# Altium PCB PCB1.PcbDoc (part 1 of 2)
Units mm, origin at the board's own origin, x right, y up, seen from the top; angles counter-clockwise.
Board outline 43.94 x 69.98 mm, 2 copper layers (Top Layer, Bottom Layer); 43 components, 85 nets, 278 pads, 109 vias.
Unrouted connection lines stored in the file: 29.
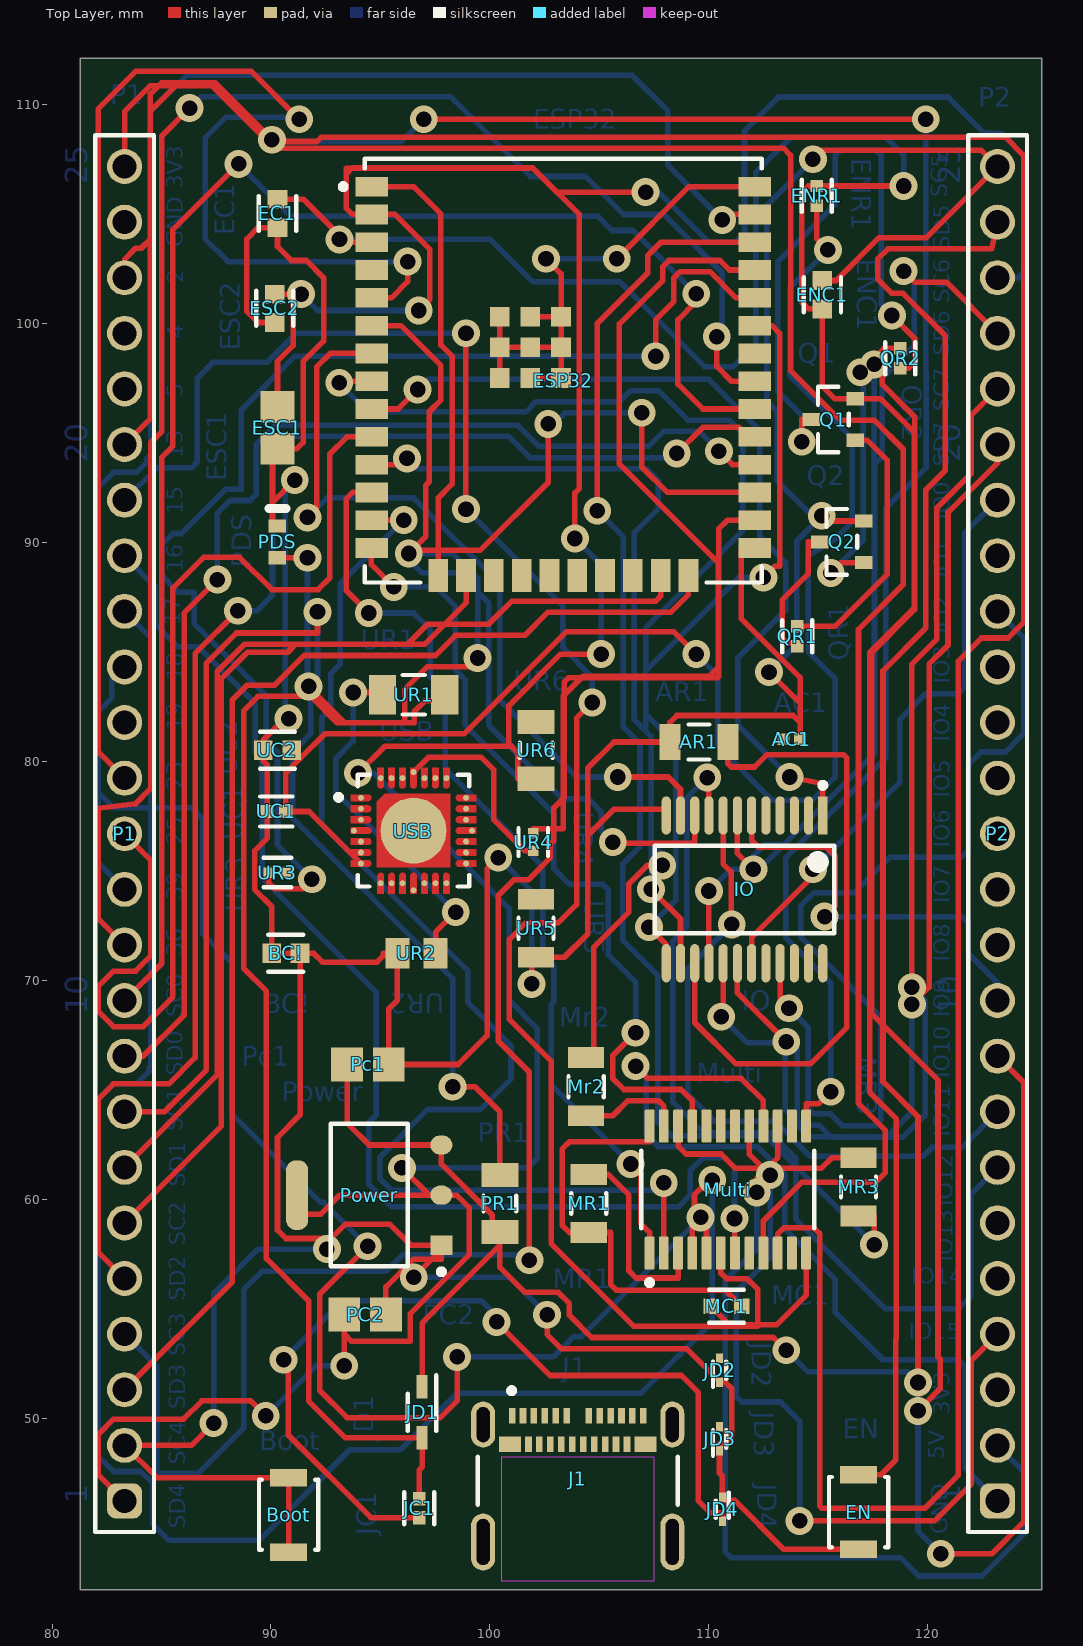
[diagram p0: Top Layer view]
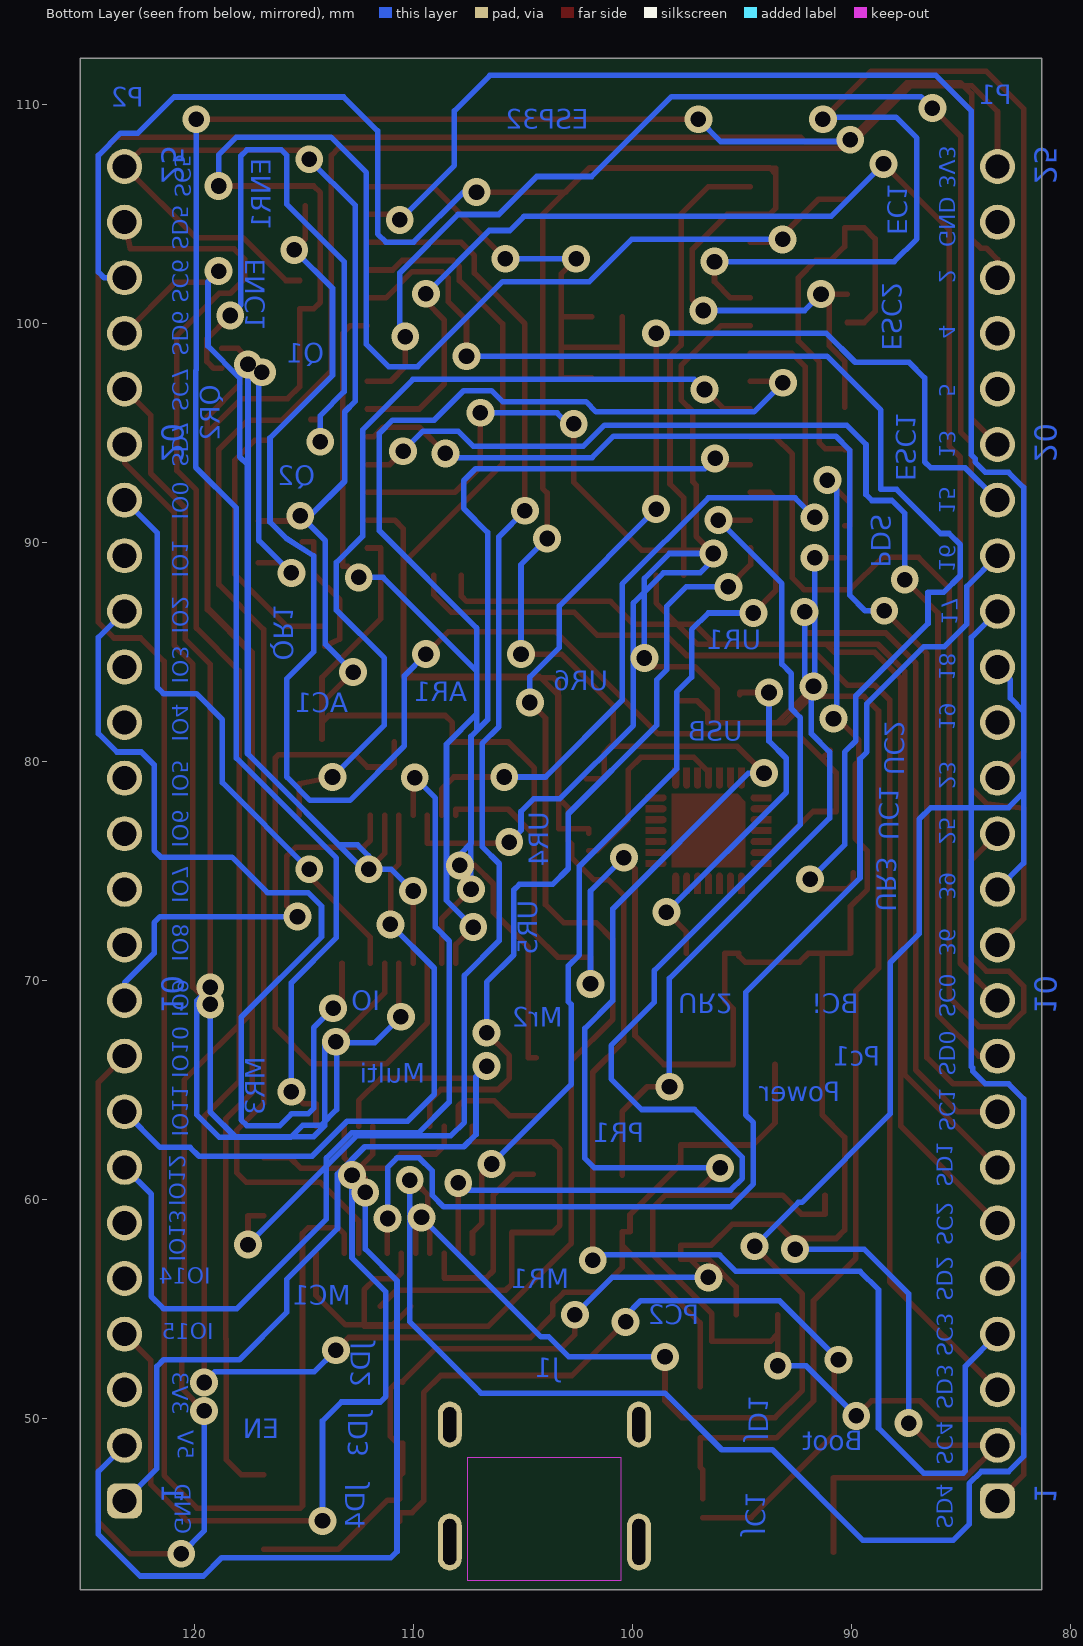
[diagram p1: Bottom Layer view, seen from below]
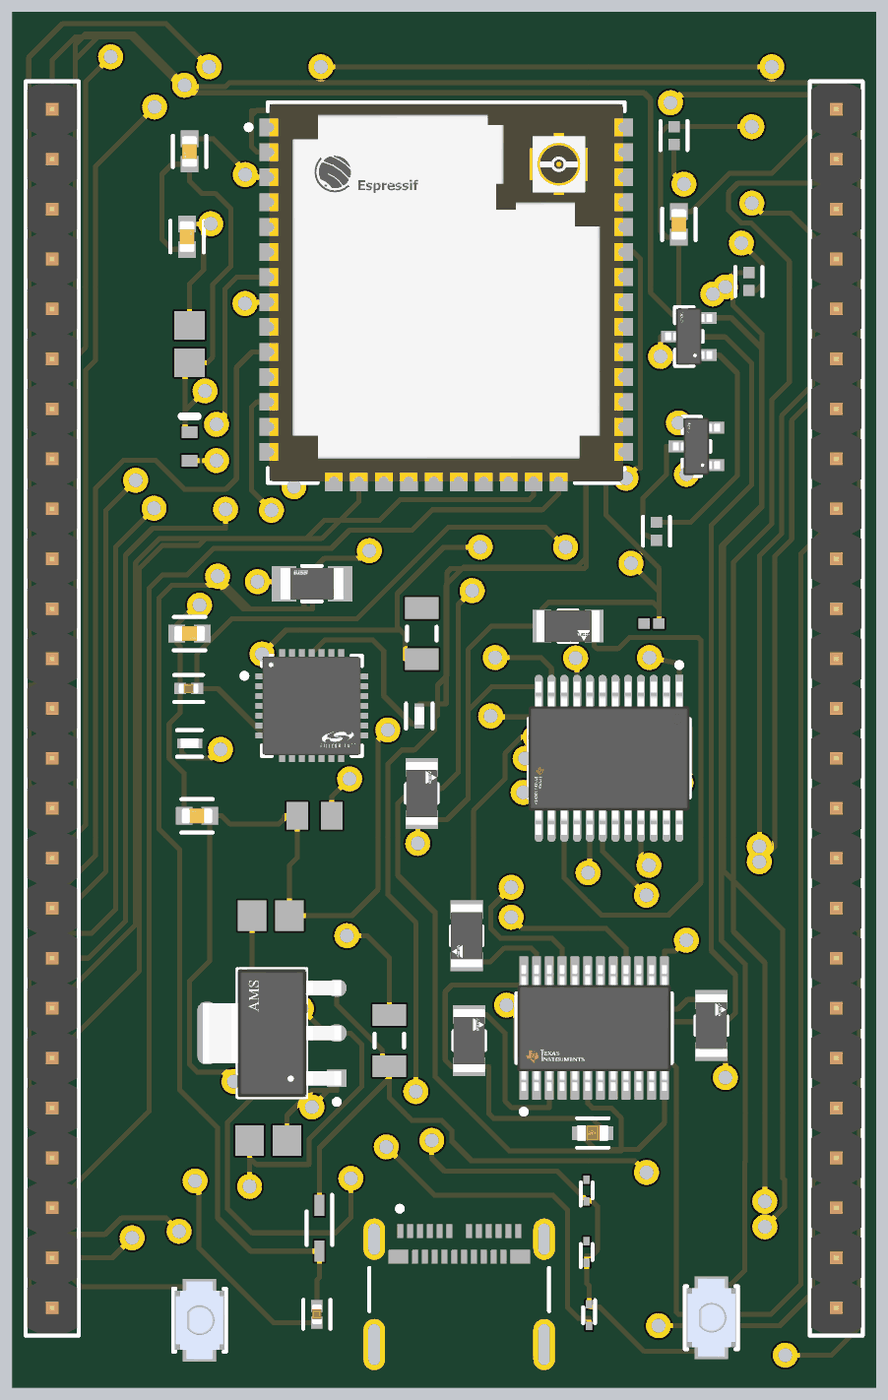
[diagram p3: 3D render of the assembled board from above, using the file's embedded part models]

## Layer stack, top to bottom
Top Solder: solder mask 0.0102, Solder Resist, Dk 3.5
Top Layer: signal copper 0.0356
Dielectric 1: dielectric 0.32, FR-4, Dk 4.8
Bottom Layer: signal copper 0.0356
Bottom Solder: solder mask 0.0102, Solder Resist, Dk 3.5

## Board outline
81.28,42.164 81.28,112.141 125.222,112.141 125.222,42.164

## Design rules (kind name [scope] priority, off if disabled: settings)
Clearance [All] p1: gap=0.254 ignorepadtopadclearanceinfootprint=FALSE except(0: Arc-Hole Track-Hole SMDPad-Hole THPad-Hole Via-Hole Fill-Hole Poly-Hole Region-Hole Text-Hole)
PolygonConnect [All] p1: connectstyle=Relief reliefconductorwidth=0.254 reliefentries=4 polygonreliefangle="90 Angle" airgapwidth=0.254
RoutingVias [All] p1: holewidth=0.711 width=1.27 viastyle="Through Hole" minholewidth=0.711 minwidth=1.27 maxholewidth=0.711 maxwidth=1.27
SolderMaskExpansion [All] p1: expansion=0.102 istentingtop=FALSE
Width [All] p1: maxlimit=0.254 minlimit=0.254 preferedwidth=0.254
30 further rules are at their usual default settings.

## Components (designator, comment, footprint, x,y, rotation, side; value= is the part's Value field where it differs from the comment)
AC1 "0.1 uF" CAPC1005X55X30LL05T10 113.792,81.026 r180 top
AR1 "10K ohm" FP-CRCW1206-e3-IPC_C 109.545,80.899 r0 top
BC! "0.1uF/50V" FP-C0603-CJ-MFG 90.678,71.247 r0 top value=100nF
Boot "B3U-1000P" FP-B3U-1000P-MFG 90.805,45.593 r90 top
EC1 "0.1uF/50V" FP-C0603-CJ-MFG 90.297,105.044 r90 top value=100nF
EN "B3U-1000P" FP-B3U-1000P-MFG 116.84,45.72 r90 top
ENC1 "0.1uF/50V" FP-C0603-CJ-MFG 115.189,101.331 r90 top value=100nF
ENR1 "10K ohm" FP-CRCW0402-e3-IPC_B 114.935,105.847 r270 top
ESC1 "22uF/10V" CAPC2013X95X45ML15T25 90.297,95.25 r90 top
ESC2 "0.1uF/50V" FP-C0603-CJ-MFG 90.17,100.711 r270 top value=100nF
ESP32 "ESP32-WROOM-32UE (4MB)" FP-ESP32-WROOM-32UE_4MB-MFG 103.351,97.86 r0 top
IO "CD74HC4067SM96" FP-DB0024A-IPC_C 111.633,74.168 r270 top
J1 "1054500101" FP-1054500101-MFG 104.013,46.355 r0 top
JC1 "GRM155R60J475ME47D" FP-GRM155-0_1-IPC_B 96.774,45.895 r270 top
JD1 "BAT760-7" SOD2513X120N 96.901,50.273 r270 top
JD2 "LESD5D5.0CT1G" SODFL1006X40N 110.49,52.197 r90 top
JD3 "LESD5D5.0CT1G" SODFL1006X40N 110.49,49.064 r90 top
JD4 "LESD5D5.0CT1G" SODFL1006X40N 110.617,45.847 r270 top
MC1 "10 uF" FP-C1608-080-0_1-MFG 110.809,55.118 r0 top
MR1 "10K ohm" FP-CRCW1206-e3-IPC_C 104.521,59.817 r90 top
Mr2 "10K ohm" FP-CRCW1206-e3-IPC_C 104.394,65.151 r270 top
MR3 "10K ohm" FP-CRCW1206-e3-IPC_C 116.84,60.579 r90 top
Multi "TCA9548APWR" FP-PW0024A-MFG 110.871,60.452 r90 top
P1 "61302511121" 61302511121 83.312,76.708 r90 top
P2 "61302511121" 61302511121 123.19,76.708 r90 top
Pc1 "22uF/10V" CAPC2013X95X45ML15T25 94.427,66.167 r180 top
PC2 "22uF/10V" CAPC2013X95X45ML15T25 94.3,54.737 r180 top
PDS "Red LED" VISH-TLMX1100_V 90.297,90.043 r90 top
Power "AMS1117-3.3" FP-AMS1117-IPC_C 94.488,60.198 r180 top
PR1 "2K ohm" RESC3216X50X50LL20T25 100.457,59.817 r270 top
Q1 "SS8050-G" FP-SS8050-G-MFG 115.691,95.631 r180 top
Q2 "SS8050-G" FP-SS8050-G-MFG 116.078,90.043 r180 top
QR1 "10K ohm" FP-CRCW0402-e3-IPC_B 114.046,85.725 r90 top
QR2 "10K ohm" FP-CRCW0402-e3-IPC_B 118.745,98.425 r90 top
UC1 "4.7uF/6.3V" FP-GRM155-0_1-IPC_B 90.249,77.724 r180 top
UC2 "0.1uF/50V" FP-C0603-CJ-MFG 90.297,80.518 r180 top value=100nF
UR1 "22.1K ohm" FP-RG3216-IPC_B 96.52,83.058 r180 top
UR2 "47.5K ohm" RESC2013X55X40NL15T20 96.647,71.247 r0 top
UR3 "0 ohm" FP-CRCW0402-e3-IPC_C 90.297,74.93 r180 top
UR4 "0 ohm" FP-CRCW0402-e3-IPC_C 101.981,76.327 r90 top
UR5 "10K ohm" FP-CRCW1206-e3-IPC_C 102.108,72.39 r90 top
UR6 "2K ohm" RESC3216X50X50LL20T25 102.108,80.518 r90 top
USB "CP2102N-A02-GQFN28R" FP-CP2102N-A02-GQFN28R-MFG 96.512,76.848 r0 top

## Footprints (in the part's own frame and the unit in brackets; to place one, negate y for a bottom-side part, rotate by r counter-clockwise, add the part's x,y. Pads: shape width x height; smd on the part's side, far side on the other; paste and mask are expansions set on the pad)
61302511121 [mm] "Pin Header, pitch 2.54 mm, THT, Vertical, single row, 25p"
  rrect50% 1.6x1.6 hole 1.1: 1(-30.48,0)
  round 1.6 hole 1.1: 2(-27.94,0) 3(-25.4,0) 4(-22.86,0) 5(-20.32,0) 6(-17.78,0) 7(-15.24,0) 8(-12.7,0) 9(-10.16,0) 10(-7.62,0) 11(-5.08,0) 12(-2.54,0) 13(0,0) 14(2.54,0) 15(5.08,0) 16(7.62,0) 17(10.16,0) 18(12.7,0) 19(15.24,0) 20(17.78,0) 21(20.32,0) 22(22.86,0) 23(25.4,0) 24(27.94,0) 25(30.48,0)
  silkscreen extent -31.9,-1.34 31.9,1.34, body extent -31.75,-1.27 31.75,1.27, height 8.57
CAPC1005X55X30LL05T10 [mm] "Chip Capacitor, 2-Leads, Body 1.00x0.50mm, IPC High Density"
  rect 0.56x0.52 smd: 1(-0.38,0) 2(0.38,0)
  body extent -0.53,-0.28 0.53,0.28, height 0.55
CAPC2013X95X45ML15T25 [mm] "Chip Capacitor, 2-Leads, Body 2.00x1.25mm, IPC Low Density"
  rect 1.45x1.55 smd: 1(-0.95,0) 2(0.95,0)
  body extent -1.08,-0.7 1.07,0.7, height 0.95
FP-1054500101-MFG [mm]
  rrect100% 1.1x2.1 hole 1.6 slot 0.6 at 0 deg paste-1000 mask+0: 1(-4.32,3.36) 2(4.32,3.36)
  rrect100% 1.1x2.6 hole 2.1 slot 0.6 at 0 deg paste-1000 mask+0: 3(-4.32,-2) 4(4.32,-2)
  rect 0.3x0.7 smd paste+0 mask+0: A1(-3,3.77) A2(-2.5,3.77) A3(-2,3.77) A4(-1.5,3.77) A5(-1,3.77) A6(-0.5,3.77) A7(0.5,3.77) A8(1,3.77) A9(1.5,3.77) A10(2,3.77) A11(2.5,3.77) A12(3,3.77) B2(2.25,2.47) B3(1.75,2.47) B4(1.25,2.47) B5(0.75,2.47) B6(0.25,2.47) B7(-0.25,2.47) B8(-0.75,2.47) B9(-1.25,2.47) B10(-1.75,2.47) B11(-2.25,2.47)
  rect 1x0.7 smd paste+0 mask+0: B1(3.1,2.47) B12(-3.1,2.47)
  Keep-Out Layer region: -3.5,-3.77 3.5,-3.77 3.5,1.88 -3.5,1.88
  silkscreen extent -4.57,-0.3 4.57,5.03
FP-AMS1117-IPC_C [mm]
  rect 1.004x0.872 smd paste+0 mask+0: 1(-3.295,2.29)
  rrect100% 1.004x0.872 smd paste+0 mask+0: 2(-3.295,0) 3(-3.295,-2.29)
  rrect87% 1.004x3.182 smd paste+0 mask+0: 4(3.295,0)
  silkscreen extent -3.42,-3.25 1.75,3.62, body extent -3.9,-3.35 3.9,3.35, height 0.25
FP-B3U-1000P-MFG [mm]
  rect 0.8x1.7 smd paste+0 mask+0: 1(-1.7,0) 2(1.7,0)
  silkscreen extent -1.6,-1.35 1.6,1.35, body extent -2.2,-1.45 2.2,1.45, height 0.25
FP-C0603-CJ-MFG [mm]
  rect 0.85x0.9 smd paste+0 mask+0: 1(-0.65,0) 2(0.65,0)
  silkscreen extent -0.8,-0.85 0.8,0.85, body extent -1.2,-0.6 1.2,0.6, height 0.25
FP-C1608-080-0_1-MFG [mm]
  rect 0.7x0.7 smd paste+0 mask+0: 1(-0.7,0) 2(0.7,0)
  silkscreen extent -0.8,-0.75 0.8,0.75, body extent -1.15,-0.55 1.15,0.55, height 0.25
FP-CP2102N-A02-GQFN28R-MFG [mm]
  round 0.27 smd paste+0 mask+0: 1(-2.4,1.5) 2(-2.4,1) 3(-2.4,0.5) 4(-2.725,0) 5(-2.4,-0.5) 6(-2.4,-1) 7(-2.4,-1.5) 8(-1.5,-2.4) 9(-1,-2.4) 10(-0.5,-2.4) 11(0,-2.725) 12(0.5,-2.4) 13(1,-2.4) 14(1.5,-2.4) 15(2.4,-1.5) 16(2.4,-1) 17(2.4,-0.5) 18(2.675,0) 19(2.4,0.5) 20(2.4,1) 21(2.4,1.5) 22(1.5,2.4) 23(1,2.4) 24(0.5,2.4) 25(0,2.675) 26(-0.5,2.4) 27(-1,2.4) 28(-1.5,2.4)
  round 3.015 smd paste-1000 mask+0: 29(0,0)
  Top Layer region: -1.325,1.675 1.675,1.675 1.675,-1.675 -1.675,-1.675 -1.675,1.325 -1.325,1.675
  Top Layer region: -1.35,2.875 -1.35,2.075 -1.361,2.018 -1.394,1.969 -1.443,1.936 -1.5,1.925 -1.5,1.925 -1.557,1.936 -1.606,1.969 -1.639,2.018 -1.65,2.075 -1.65,2.075 -1.65,2.875
  Top Layer region: -0.85,2.875 -0.85,2.075 -0.861,2.018 -0.894,1.969 -0.943,1.936 -1,1.925 -1,1.925 -1.057,1.936 -1.106,1.969 -1.139,2.018 -1.15,2.075 -1.15,2.075 -1.15,2.875
  Top Layer region: -0.35,2.875 -0.35,2.075 -0.361,2.018 -0.394,1.969 -0.443,1.936 -0.5,1.925 -0.5,1.925 -0.557,1.936 -0.606,1.969 -0.639,2.018 -0.65,2.075 -0.65,2.075 -0.65,2.875
  Top Layer region: 0.15,2.875 0.15,2.075 0.139,2.018 0.106,1.969 0.057,1.936 0,1.925 0,1.925 -0.057,1.936 -0.106,1.969 -0.139,2.018 -0.15,2.075 -0.15,2.075 -0.15,2.875
  Top Layer region: 0.65,2.875 0.65,2.075 0.639,2.018 0.606,1.969 0.557,1.936 0.5,1.925 0.5,1.925 0.443,1.936 0.394,1.969 0.361,2.018 0.35,2.075 0.35,2.075 0.35,2.875
  Top Layer region: 1.15,2.875 1.15,2.075 1.139,2.018 1.106,1.969 1.057,1.936 1,1.925 1,1.925 0.943,1.936 0.894,1.969 0.861,2.018 0.85,2.075 0.85,2.075 0.85,2.875
  Top Layer region: 1.65,2.875 1.65,2.075 1.639,2.018 1.606,1.969 1.557,1.936 1.5,1.925 1.5,1.925 1.443,1.936 1.394,1.969 1.361,2.018 1.35,2.075 1.35,2.075 1.35,2.875
  Top Layer region: 2.875,1.35 2.075,1.35 2.018,1.361 1.969,1.394 1.936,1.443 1.925,1.5 1.925,1.5 1.936,1.557 1.969,1.606 2.018,1.639 2.075,1.65 2.075,1.65 2.875,1.65
  Top Layer region: 2.875,0.85 2.075,0.85 2.018,0.861 1.969,0.894 1.936,0.943 1.925,1 1.925,1 1.936,1.057 1.969,1.106 2.018,1.139 2.075,1.15 2.075,1.15 2.875,1.15
  Top Layer region: 2.875,0.35 2.075,0.35 2.018,0.361 1.969,0.394 1.936,0.443 1.925,0.5 1.925,0.5 1.936,0.557 1.969,0.606 2.018,0.639 2.075,0.65 2.075,0.65 2.875,0.65
  Top Layer region: 2.875,-0.15 2.075,-0.15 2.018,-0.139 1.969,-0.106 1.936,-0.057 1.925,0 1.925,0 1.936,0.057 1.969,0.106 2.018,0.139 2.075,0.15 2.075,0.15 2.875,0.15
  Top Layer region: 2.875,-0.65 2.075,-0.65 2.018,-0.639 1.969,-0.606 1.936,-0.557 1.925,-0.5 1.925,-0.5 1.936,-0.443 1.969,-0.394 2.018,-0.361 2.075,-0.35 2.075,-0.35 2.875,-0.35
  Top Layer region: 2.875,-1.15 2.075,-1.15 2.018,-1.139 1.969,-1.106 1.936,-1.057 1.925,-1 1.925,-1 1.936,-0.943 1.969,-0.894 2.018,-0.861 2.075,-0.85 2.075,-0.85 2.875,-0.85
  Top Layer region: 2.875,-1.65 2.075,-1.65 2.018,-1.639 1.969,-1.606 1.936,-1.557 1.925,-1.5 1.925,-1.5 1.936,-1.443 1.969,-1.394 2.018,-1.361 2.075,-1.35 2.075,-1.35 2.875,-1.35
  Top Layer region: 1.35,-2.875 1.35,-2.075 1.361,-2.018 1.394,-1.969 1.443,-1.936 1.5,-1.925 1.5,-1.925 1.557,-1.936 1.606,-1.969 1.639,-2.018 1.65,-2.075 1.65,-2.075 1.65,-2.875
  Top Layer region: 0.85,-2.875 0.85,-2.075 0.861,-2.018 0.894,-1.969 0.943,-1.936 1,-1.925 1,-1.925 1.057,-1.936 1.106,-1.969 1.139,-2.018 1.15,-2.075 1.15,-2.075 1.15,-2.875
  Top Layer region: 0.35,-2.875 0.35,-2.075 0.361,-2.018 0.394,-1.969 0.443,-1.936 0.5,-1.925 0.5,-1.925 0.557,-1.936 0.606,-1.969 0.639,-2.018 0.65,-2.075 0.65,-2.075 0.65,-2.875
  Top Layer region: -0.15,-2.875 -0.15,-2.075 -0.139,-2.018 -0.106,-1.969 -0.057,-1.936 0,-1.925 0,-1.925 0.057,-1.936 0.106,-1.969 0.139,-2.018 0.15,-2.075 0.15,-2.075 0.15,-2.875
  Top Layer region: -0.65,-2.875 -0.65,-2.075 -0.639,-2.018 -0.606,-1.969 -0.557,-1.936 -0.5,-1.925 -0.5,-1.925 -0.443,-1.936 -0.394,-1.969 -0.361,-2.018 -0.35,-2.075 -0.35,-2.075 -0.35,-2.875
  Top Layer region: -1.15,-2.875 -1.15,-2.075 -1.139,-2.018 -1.106,-1.969 -1.057,-1.936 -1,-1.925 -1,-1.925 -0.943,-1.936 -0.894,-1.969 -0.861,-2.018 -0.85,-2.075 -0.85,-2.075 -0.85,-2.875
  Top Layer region: -1.65,-2.875 -1.65,-2.075 -1.639,-2.018 -1.606,-1.969 -1.557,-1.936 -1.5,-1.925 -1.5,-1.925 -1.443,-1.936 -1.394,-1.969 -1.361,-2.018 -1.35,-2.075 -1.35,-2.075 -1.35,-2.875
  Top Layer region: -2.875,-1.35 -2.075,-1.35 -2.018,-1.361 -1.969,-1.394 -1.936,-1.443 -1.925,-1.5 -1.925,-1.5 -1.936,-1.557 -1.969,-1.606 -2.018,-1.639 -2.075,-1.65 -2.075,-1.65 -2.875,-1.65
  Top Layer region: -2.875,-0.85 -2.075,-0.85 -2.018,-0.861 -1.969,-0.894 -1.936,-0.943 -1.925,-1 -1.925,-1 -1.936,-1.057 -1.969,-1.106 -2.018,-1.139 -2.075,-1.15 -2.075,-1.15 -2.875,-1.15
  Top Layer region: -2.875,-0.35 -2.075,-0.35 -2.018,-0.361 -1.969,-0.394 -1.936,-0.443 -1.925,-0.5 -1.925,-0.5 -1.936,-0.557 -1.969,-0.606 -2.018,-0.639 -2.075,-0.65 -2.075,-0.65 -2.875,-0.65
  Top Layer region: -2.875,0.15 -2.075,0.15 -2.018,0.139 -1.969,0.106 -1.936,0.057 -1.925,0 -1.925,0 -1.936,-0.057 -1.969,-0.106 -2.018,-0.139 -2.075,-0.15 -2.075,-0.15 -2.875,-0.15
  Top Layer region: -2.875,0.65 -2.075,0.65 -2.018,0.639 -1.969,0.606 -1.936,0.557 -1.925,0.5 -1.925,0.5 -1.936,0.443 -1.969,0.394 -2.018,0.361 -2.075,0.35 -2.075,0.35 -2.875,0.35
  Top Layer region: -2.875,1.15 -2.075,1.15 -2.018,1.139 -1.969,1.106 -1.936,1.057 -1.925,1 -1.925,1 -1.936,0.943 -1.969,0.894 -2.018,0.861 -2.075,0.85 -2.075,0.85 -2.875,0.85
  Top Layer region: -2.875,1.65 -2.075,1.65 -2.018,1.639 -1.969,1.606 -1.936,1.557 -1.925,1.5 -1.925,1.5 -1.936,1.443 -1.969,1.394 -2.018,1.361 -2.075,1.35 -2.075,1.35 -2.875,1.35
  silkscreen extent -3.55,-2.55 2.55,2.55, body extent -2.98,-2.98 2.98,2.98, height 0.25
FP-CRCW0402-e3-IPC_B [mm]
  rect 0.568x0.572 smd paste+0 mask+0: 1(-0.452,0) 2(0.452,0)
  silkscreen extent -0.74,-0.69 0.74,0.69
FP-CRCW0402-e3-IPC_C [mm]
  rect 0.468x0.472 smd paste+0 mask+0: 1(-0.402,0) 2(0.402,0)
  silkscreen extent -0.64,-0.67 0.64,0.67, body extent -0.74,-0.38 0.74,0.38, height 0.25
FP-CRCW1206-e3-IPC_C [mm]
  rect 0.956x1.658 smd paste+0 mask+0: 1(-1.326,0) 2(1.326,0)
  silkscreen extent -0.47,-0.8 0.47,0.8, body extent -1.9,-0.97 1.9,0.97, height 0.25
FP-DB0024A-IPC_C [mm]
  rect 1.753x0.415 smd paste+0 mask+0: 1(-3.375,3.575)
  rrect100% 1.753x0.415 smd paste+0 mask+0: 2(-3.375,2.925) 3(-3.375,2.275) 4(-3.375,1.625) 5(-3.375,0.975) 6(-3.375,0.325) 7(-3.375,-0.325) 8(-3.375,-0.975) 9(-3.375,-1.625) 10(-3.375,-2.275) 11(-3.375,-2.925) 12(-3.375,-3.575) 13(3.375,-3.575) 14(3.375,-2.925) 15(3.375,-2.275) 16(3.375,-1.625) 17(3.375,-0.975) 18(3.375,-0.325) 19(3.375,0.325) 20(3.375,0.975) 21(3.375,1.625) 22(3.375,2.275) 23(3.375,2.925) 24(3.375,3.575)
  silkscreen extent -4.88,-4.1 2,4.1, body extent -4.35,-4.2 4.35,4.2, height 0.25
FP-ESP32-WROOM-32UE_4MB-MFG [mm]
  rect 1.5x0.9 smd paste+0 mask+0: 1(-8.75,8.41) 2(-8.75,7.14) 3(-8.75,5.87) 4(-8.75,4.6) 5(-8.75,3.33) 6(-8.75,2.06) 7(-8.75,0.79) 8(-8.75,-0.48) 9(-8.75,-1.75) 10(-8.75,-3.02) 11(-8.75,-4.29) 12(-8.75,-5.56) 13(-8.75,-6.83) 14(-8.75,-8.1) 25(8.75,-8.1) 26(8.75,-6.83) 27(8.75,-5.56) 28(8.75,-4.29) 29(8.75,-3.02) 30(8.75,-1.75) 31(8.75,-0.48) 32(8.75,0.79) 33(8.75,2.06) 34(8.75,3.33) 35(8.75,4.6) 36(8.75,5.87) 37(8.75,7.14) 38(8.75,8.41)
  rect 0.9x1.5 smd paste+0 mask+0: 15(-5.71,-9.35) 16(-4.44,-9.35) 17(-3.17,-9.35) 18(-1.9,-9.35) 19(-0.63,-9.35) 20(0.64,-9.35) 21(1.91,-9.35) 22(3.18,-9.35) 23(4.45,-9.35) 24(5.72,-9.35)
  rect 0.9x0.9 smd paste+0 mask+0: 39(-2.9,-0.33) 39(-2.9,1.07) 39(-2.9,2.47) 39(-1.5,-0.33) 39(-1.5,1.07) 39(-1.5,2.47) 39(-0.1,-0.33) 39(-0.1,1.07) 39(-0.1,2.47)
  silkscreen extent -10.17,-9.68 9.08,9.68, body extent -9.6,-10.2 9.6,9.77, height 0.25
FP-GRM155-0_1-IPC_B [mm]
  rect 0.615x0.572 smd paste+0 mask+0: 1(-0.429,0) 2(0.429,0)
  silkscreen extent -0.74,-0.69 0.74,0.69, body extent -0.89,-0.44 0.89,0.44, height 0.25
FP-PW0024A-MFG [mm]
  rrect22% 1.5x0.45 smd paste+0 mask+0: 1(-2.9,3.575) 2(-2.9,2.925) 3(-2.9,2.275) 4(-2.9,1.625) 5(-2.9,0.975) 6(-2.9,0.325) 7(-2.9,-0.325) 8(-2.9,-0.975) 9(-2.9,-1.625) 10(-2.9,-2.275) 11(-2.9,-2.925) 12(-2.9,-3.575) 13(2.9,-3.575) 14(2.9,-2.925) 15(2.9,-2.275) 16(2.9,-1.625) 17(2.9,-0.975) 18(2.9,-0.325) 19(2.9,0.325) 20(2.9,0.975) 21(2.9,1.625) 22(2.9,2.275) 23(2.9,2.925) 24(2.9,3.575)
  silkscreen extent -4.37,-3.95 1.78,3.95, body extent -3.75,-4.2 3.75,4.2, height 0.25
FP-RG3216-IPC_B [mm]
  rect 1.255x1.806 smd paste+0 mask+0: 1(-1.426,0) 2(1.426,0)
  silkscreen extent -0.5,-0.9 0.5,0.9, body extent -2.3,-1.15 2.3,1.15, height 0.25
FP-SS8050-G-MFG [mm]
  rect 0.8x0.6 smd paste+0 mask+0: 1(-1.01,0.95) 2(-1.01,-0.95) 3(1.01,0)
  silkscreen extent -0.7,-1.5 0.7,1.5, body extent -1.51,-1.6 1.51,1.6, height 0.25
RESC2013X55X40NL15T20 [mm] "Chip Resistor, 2-Leads, Body 2.00x1.25mm, IPC Medium Density"
  rect 1.1x1.4 smd: 1(-0.875,0) 2(0.875,0)
  body extent -1.07,-0.7 1.08,0.7, height 0.55
RESC3216X50X50LL20T25 [mm] "Chip Resistor, 2-Leads, Body 3.20x1.60mm, IPC High Density"
  rect 1.1x1.7 smd: 1(-1.3,0) 2(1.3,0)
  silkscreen extent -0.35,-0.75 0.35,0.75, body extent -1.7,-0.9 1.7,0.9, height 0.5
SOD2513X120N [mm]
  rect 1.075x0.5 smd: 1(-1.162,0) 2(1.162,0)
  silkscreen extent -1.7,-0.65 0.85,0.65
SODFL1006X40N [mm]
  rect 0.43x0.32 smd: 1(-0.55,0) 2(0.55,0)
  silkscreen extent -0.76,-0.3 0.4,0.3
VISH-TLMX1100_V [mm] "SMD, 2-Leads, Body 1.6x0.8mm"
  rect 0.6x0.8 smd: 1(-0.725,0) 2(0.725,0)
  silkscreen extent 1.53,-0.4 1.53,0.4, body extent -0.8,-0.4 0.8,0.4, height 0.65

## Part data
AC1: library part CMP-0001-00074-2, Manufacturer=Kemet, Part Number=C0402C104K4RACTU
AR1 MR1 Mr2 MR3 UR5: library part CMP-2003-04807-2, "RES Thick Film, 10kΩ, 1%, 0.25W, 100ppm/°C, 1206", Case Code (Imperial)=1206, Case Code (Metric)=3216, Max Operating Temperature=155°C, Max Power Dissipation=250mW, Min Operating Temperature=-55°C, Package Quantity=10, Resistance=10kR, Temperature Coefficient=100ppm/°C, Tolerance=1%, Voltage Rating=200V, Case/Package=1206, Composition="Thick Film", Contact Plating=Tin, Depth=1.6mm, Features="Automotive AEC-Q200", Height=0.55mm, Lead Free="Lead Free", Length=3.2mm, Military Standard=Not, Number of Pins=2, Number of Terminations=2, Packaging="Tape and Reel", Power Rating=250mW, Radiation Hardening=No, Termination=SMD/SMT, Voltage Rating (DC)=200V, Weight=0.000353oz, Width=0.063inch, Working Voltage=200V
BC! EC1 ENC1 ESC2 UC2: library part CMP-2006-03300-2, "CAP CER 0.1UF 50V X7R 0603", Capacitance=100nF, Manufacturer=Kemet, Manufacturer Part Number=C0603X104K5RACTU, Package=C0603-CJ, Temperature="-55°C to +125°C", Temperature Characteristic=X7R, Temperature Coefficient=15%, Temperature Range High=+125°C, Temperature Range Low=-55°C, Tolerance=10%, Voltage=50V, Automotive=No, Category=Cap, ComponentLink2Description=Datasheet, ComponentLink2URL=https://content.kemet.com/datasheets/KEM_C1013_X7R_FT-CAP_SMD.pdf, Device Class L1="Passive Components", Device Class L2=Capacitors, Device Class L3="Ceramic Capacitors", Digikey Description="CAP CER 0.1UF 50V X7R 0603", Height=0.95mm, Ipc Land Pattern Name=CAPC16080X80, Lead Free=Yes, Material=Ceramic, Mouser Description="Capacitor; Ceramic; Cap 0.1uF; Tol+10%; SMT; Flexible Termination; Vol-Rtg 50V; TR", Octopart=https://octopart.com/c0603x104k5ractu-kemet-9145062, RoHS=TRUE, Voltage Rating=50V
Boot EN: library part CMP-2100-03586-2, "SWITCH TACTILE SPST-NO 0.05A 12V", Contact Current Rating=50mA, Contact Resistance=100mR, Insulation Resistance=100MR, Max Operating Temperature=70°C, Max Voltage Rating (DC)=12V, Min Operating Temperature=-25°C, Operating Force=1.5N, Package Quantity=1, Ratings="Dust Proof", Actuator Length=0.4mm, Actuator Type=Standard, Contact Material=Silver, Current Rating=50mA, Depth=2.5mm, Electrical Life=200000Cycles, Height=1.2mm, Illumination Type=Non-Illuminated, Lead Free="Lead Free", Length=4mm, Max Current Rating=50mA, Mechanical Life=200000Cycles, Mount="Surface Mount", Orientation=Straight, Packaging="Tape and Reel", Switch Function=Off-Mom, Switch Travel=0.15mm, Termination=SMD/SMT, Throw Configuration=SPST, Voltage Rating (DC)=12V, Weight=0.000776oz, Width=3mm
ENR1 QR1 QR2: library part CMP-2002-08135-2, "RES SMD 10K OHM 1% 1/16W 0402", Case Code (Imperial)=0402, Case Code (Metric)=1005, Max Operating Temperature=155°C, Max Power Dissipation=63mW, Min Operating Temperature=-55°C, Package Quantity=10, Resistance=10kR, Temperature Coefficient=100ppm/°C, Tolerance=1%, Voltage Rating=50V, Case/Package=0402, Composition="Thick Film", Contact Plating=Tin, Depth=0.5mm, Features="Automotive AEC-Q200", Height=0.35mm, Lead Free="Lead Free", Length=1mm, Military Standard=Not, Mount="Surface Mount", Number of Pins=2, Number of Terminations=2, Packaging="Tape and Reel", Power Rating=63mW, Radiation Hardening=No, Termination=SMD/SMT, Voltage Rating (DC)=50V, Weight=2.3E-05oz, Width=0.02inch
ESC1 Pc1 PC2: library part CMP-2007-00096-1, Manufacturer=Murata, Part Number=GRM219R61A226MEA0D
ESP32: library part CMP-194065-000015-1, "RX TXRX MODULE WIFI U.FL SMD"
IO: library part CMP-04892-000038-1, "IC MUX/DEMUX 1X16 24SSOP", Case/Package=SSOP, High Level Output Current=25mA, Max Operating Temperature=125°C, Max Supply Current=8uA, Max Supply Voltage=6V, Min Operating Temperature=-55°C, Min Supply Voltage=2V, On-State Resistance=160R, Package Quantity=2000, Bandwidth=89MHz, Contact Plating=Gold, Height=1.95mm, Lead Free="Lead Free", Length=8.2mm, Logic Function=Multiplexer, Low Level Output Current=25mA, Max Output Current=25mA, Mount="Surface Mount", Number of Bits=16, Number of Channels=1, Number of Circuits=16, Number of Inputs=16, Number of Outputs=1, Number of Pins=24, Operating Supply Current=8uA, Packaging="Tape and Reel", Polarity=Non-Inverting, Propagation Delay=75ns, Radiation Hardening=No, REACH SVHC="No SVHC", Series=74HC, Supply Type=Single, Termination=SMD/SMT, Turn-Off Delay Time=290ns, Turn-On Delay Time=300ns, Weight=0.006081oz, Width=5.3mm
J1: library part CMP-04767-000004-1, "CONN RCP USB3.1 TYPEC 24P SMD RA", Current Rating=0.25/1.25/5A, Manufacturer=Molex, Package=0, Temperature="-30°C to +85°C", Temperature Range High=+85°C, Temperature Range Low=-30°C, Voltage Rating=30V, Automotive=No, Category=Conn, ComponentLink2Description=Datasheet, ComponentLink2URL=https://www.molex.com/webdocs/datasheets/pdf/en-us/1054500101_IO_CONNECTORS.pdf, Conn Orientation="Right Angle", Contact Material=Gold,Nickel, Device Class L1=Connectors, Device Class L2="USB Connectors", Device Class L3=unset, Digikey Description="CONN RCP USB3.1 TYPEC 24P SMD RA", Footprint Url=https://www.molex.com/pdm_docs/sd/1054500101_sd.pdf, Height=3.44mm, Is Female=yes, Lead Free=Yes, Manufacturer Part Number=1054500101, Mouser Description="USB Shielded I/O Receptacle; Type C; Right Angle; Surface Mount; Gold over Nickel", Number Of Contacts=24, Octopart=https://octopart.com/105450-0101-molex-68082325, Pitch=0.5mm, RoHS=TRUE, Shielding=true, Usb Standard="USB 3.1"
JC1 UC1: library part CMP-2008-04549-2, "Chip Multilayer Ceramic Capacitors for General Purpose, 0402, 4.7uF, X5R, 15%, 20%, 6.3V", Capacitance=4.7uF, Case Code (Imperial)=0402, Case Code (Metric)=1005, Dielectric=X5R, Max Operating Temperature=85°C, Min Operating Temperature=-55°C, Package Quantity=10000, Tolerance=20%, Voltage=6.3V, Case/Package=0402, Contact Plating=Tin, Depth=0.5mm, Height=0.5mm, Lead Free="Lead Free", Length=1mm, Mount="Surface Mount", Packaging="Tape and Reel", REACH SVHC="No SVHC", Termination=SMD/SMT, Thickness=0.022inch, Voltage Rating=6.3V, Voltage Rating (DC)=6.3V, Weight=0.000212oz, Width=0.02inch
JD1: "Diode Schottky 30V 1A 2Pin SOD323 Diodes Inc BAT760-7, SMT Schottky Diode, 30V 1A, 2-Pin SOD-323", Manufacturer_Name="Diodes Incorporated", Mouser Part Number=621-BAT760-7, Datasheet Link=https://www.diodes.com/assets/Datasheets/ds30498.pdf, Geometry.Height=1.2mm, Manufacturer_Part_Number=BAT760-7, Mouser Price/Stock=https://www.mouser.co.uk/ProductDetail/Diodes-Incorporated/BAT760-7?qs=JV7lzlMm3yKDDyO09xoRbQ%3D%3D
JD2 JD3 JD4: library part CPDQ5V0-HF, "ESD Suppressors / TVS Diodes SMD ESD Diode 5V Bi-Direction", Manufacturer_Name="Comchip Technology", Mouser Part Number=750-CPDQ5V0-HF, Datasheet Link=https://datasheet.datasheetarchive.com/originals/distributors/Datasheets-DGA26/1842344.pdf, Geometry.Height=0.4mm, Manufacturer_Part_Number=CPDQ5V0-HF, Mouser Price/Stock=https://www.mouser.co.uk/ProductDetail/Comchip-Technology/CPDQ5V0-HF?qs=ccyN4P6STah119k8k5VB0Q%3D%3D
MC1: library part CMP-2000-04979-3, "Multilayer Ceramic Capacitors 10μF ±10% 10V X5R SMD 0603", Capacitance=10uF, Case Code (Imperial)=0603, Case Code (Metric)=1608, Dielectric=X5R, Dielectric Material=Ceramic, Max Operating Temperature=85°C, Min Operating Temperature=-55°C, Package Quantity=1, Tolerance=10%, Voltage=10V, Case/Package=0603, Construction=Flat, Depth=0.8mm, Height=0.8mm, Lead Free="Lead Free", Length=1.6mm, Mount="Surface Mount", Number of Pins=2, Packaging="Tape and Reel", Radiation Hardening=No, REACH SVHC="No SVHC", Resistor Type=Ceramic, RoHS Compliant=Yes, Series=C, Termination=SMD/SMT, Thickness=0.035inch, Voltage Rating=10V, Voltage Rating (DC)=10V, Weight=7.1E-05oz, Width=0.8mm
Multi: library part CMP-04892-000002-1, "IC I2C SW 8CH W/RESET 24TSSOP", Ambient Temperature Range High=+85°C, Ambient Temperature Range Low=-40°C, Manufacturer="Texas Instruments", Max Supply Voltage=5.5V, Min Supply Voltage=1.65V, Nominal Supply Current=2-50uA, Package=PW0024A, Temperature="-40°C to +85°C", Automotive=No, Category=IC, ComponentLink2Description=Datasheet, ComponentLink2URL=http://www.ti.com/lit/ds/symlink/tca9548a.pdf, Device Class L1="Integrated Circuits (ICs)", Device Class L2="Interface ICs", Device Class L3=Multiplexers, Digikey Description="IC I2C SW 8CH W/RESET 24TSSOP", Height=1.2mm, Interface=I2C,SMBus, Ipc Land Pattern Name=SOP65P640X120-24, Lead Free=Yes, Manufacturer Part Number=TCA9548APWR, Mouser Description="Low-Voltage 8-Channel I2C Switch With Reset 24-TSSOP -40 to 85", Mux Demux Ratio=1:8, Number of Circuits=1, Octopart=https://octopart.com/tca9548apwr-texas+instruments-22266789, RoHS=TRUE, Standoff Height=0.05mm, Temperature Range High=+85°C, Temperature Range Low=-40°C
P1 P2: library part CMP-1502-01112-2, Color=Black, Contact Resistance=20mΩ, Current Rating=3A, Operating Supply Voltage=250V, Connector Type="Male Pin", Contact Material=Copper, Contact Mating Length=5.9944mm, Contact Plating=Gold, Gender=Male, Lead Pitch=2.54mm, Mount="Through Hole", NexarPartId=32855564, Number Of Contacts=25, Number of Pins=25, Number of Positions=25, Number of Rows=1, Orientation=Vertical, Packaging=Bulk, Pitch=2.54mm, REACH SVHC=Unknown, RoHS=Compliant, Termination=Solder
PDS: library part CMP-1666-00027-1, "LED, RED, 2.1 V, -40 to 100 degC, 2-Pin SMD (0603), RoHS, Tape and Reel", Capacitance="12 pF", Case Code (Imperial)=0603, Case Code (Metric)=1608, Max Operating Temperature=125degC, Min Operating Temperature=-55degC, Package Quantity=4000, Resistance="100000000000 Ohm", Tolerance=5%, Type (Capacitors)=C0G, Voltage Rating="50 V", Case/Package=0603, ComponentLink1Description="Manufacturer URL", ComponentLink1URL=http://www.vishay.com/, ComponentLink2Description=Datasheet, ComponentLink2URL=http://www.vishay.com/docs/83173/tlmb1100.pdf, DatasheetVersion="Rev. 2.7, 03/2016", Height="0.8 mm", Length="1.6 mm", Mount="Surface Mount", PackageDescription="2-Pin Surface Mount Device, Body 1.6 x 0.8 mm", PackageReference=TLMX1100, Packaging="Tape and Reel", Pins=2, Radiation Hardening=No, REACH SVHC="No SVHC", RoHSCompliant=True, Voltage Rating (DC)="50 V", Width="0.8 mm"
Power: library part CMP-209535-000001-1, "LDO Voltage Regulators 1A, 3.3V", Dropout Voltage=1.1V, Manufacturer="Advanced Monolithic Systems", Max Junction Temp=+125°C, Max Power Dissipation=1.2W, Max Supply Voltage=15V, Nominal Supply Current=5mA, Output Current=1A, Output Voltage=3.3V, Package=AMS1117, Temperature="-40°C to +125°C", Temperature Range Low=-40°C, Automotive=No, Category=IC, ComponentLink2Description=Datasheet, ComponentLink2URL=http://www.advanced-monolithic.com/pdf/ds1117.pdf, Device Class L1="Integrated Circuits (ICs)", Device Class L2="Power Management ICs", Device Class L3="Voltage Regulators - Linear", Height=1.8mm, Ipc Land Pattern Name=SOT229P700X180-4, Lead Free=Yes, Manufacturer Part Number=AMS1117-3.3, Number of Outputs=1, Octopart=https://octopart.com/ams1117-3.3-advanced+monolithic+systems-25899300, Output Type=Fixed, RoHS=TRUE, Standoff Height=0.64mm, Temperature Range High=+125°C
PR1 UR6: library part CMP-2003-02566-1, Manufacturer=Susumu, Part Number=RG3216P-2001-B-T1
Q1 Q2: library part CMP-20235-000001-1, "NPN TRANSISTOR 1.5A 40V SOT-23 R", Case/Package=TO-236-3, Collector Emitter Breakdown Voltage=25V, Collector Emitter Voltage (VCEO)=400mV, Max Collector Current=1.5A, Max Power Dissipation=300mW, Transition Frequency=100MHz, Max Breakdown Voltage=25V, Mount="Surface Mount", Packaging="Tape and Reel", RoHS Compliant=Yes
UR1: library part CMP-28537-004057-1, "Automotive Metal Thin Film Chip Resistor, 1206, 22.1kΩ, 0.25%, 5ppm/°C, 0.25W, 200V", Case Code (Imperial)=1206, Case Code (Metric)=3216, Max Operating Temperature=155°C, Max Power Dissipation=250mW, Min Operating Temperature=-55°C, Power Rating=125mW, Resistance=22.1kR, Temperature Coefficient=5ppm/°C, Tolerance=0.25%, Voltage Rating=150V, Voltage Rating (DC)=200V, Case/Package=1206, Features="Automotive AEC-Q200", Height=400um, Lead Free="Lead Free", Length=3.2mm, Number of Terminations=2, Packaging="Tape and Reel", RoHS Compliant=Yes, Series=RG, Termination=SMD/SMT, Width=1.6mm
UR2: library part CMP-2001-04773-1, Manufacturer="Vishay Dale", Part Number=TNPW080547K5BEEN
UR3 UR4: library part CMP-2002-08122-2, "RES Thick Film, 0Ω, 0.063W, 0402", Case Code (Imperial)=0402, Case Code (Metric)=1005, Max Operating Temperature=155°C, Max Power Dissipation=63mW, Min Operating Temperature=-55°C, Package Quantity=1, Resistance=0mR, Temperature Coefficient=100ppm/°C, Tolerance=5%, Voltage Rating=50V, Case/Package=0402, Composition="Thick Film", Contact Plating=Tin, Depth=0.5mm, Features="Automotive AEC-Q200", Height=0.35mm, Lead Free="Lead Free", Length=1mm, Military Standard=Not, Mount="Surface Mount", Number of Terminations=2, Packaging="Tape and Reel", Power Rating=63mW, Radiation Hardening=No, Termination=SMD/SMT, Voltage Rating (DC)=50V, Weight=2.3E-05oz, Width=0.5mm
USB: library part CMP-08093-000007-1, "IC USB TO UART BRIDGE QFN28"

## Via types
v1: diameter 1.27, hole 0.711, Top Layer to Bottom Layer, 109 vias

## Nets (pads, with @x,y where several pads share a name; then routed paths per layer and width w, separated by ;. In a path a pad name is that pad's centre, name@x,y a point inside that pad or via, vN(x,y) a via of type N, cw(c..) or ccw(c..) an arc to the next point about the centre after c; other vN are vias at no path point)
3.3V: ESC1.2 ESC2.1 ESP32.2 P1.1 P2.23 PC2.2 Power.2 Power.4 UR6.1 | length 184.9
  Top Layer w0.254: P1.1@83.312,46.228 82.118,47.422 82.118,49.276 82.804,49.962 86.004,49.962 86.843,50.8 89.078,50.8 v1(89.764,50.114) ; ESC2.1@90.17,101.361 v1@91.008,101.361 ; ESC1.2@90.297,96.2 90.297,98.296 91.008,99.008 v1@91.008,101.361 ; Power.4@91.193,60.198 91.193,59.334 92.278,59.334 93.142,60.198 97.231,60.198 ; v1(91.374,101.361) v1@91.008,101.361 ; v1(93.35,52.4) 93.35,53.848 ; PC2.2@93.35,54.737 93.35,53.848 ; v1(93.98,79.477) 95.209,80.705 100.981,80.705 ; v1(95.987,61.443) 97.231,60.198 ; v1(96.749,100.609) 97.257,101.117 97.257,103.403 95.66,105 ESP32.2@94.601,105 93.726,105 93.447,105.279 93.447,106.858 ; UR6.1@102.108,79.218 101.27,79.218 101.27,80.416 100.981,80.705 ; v1(103.886,90.195) 103.886,92.278 104.089,92.481 104.089,104.999 103.069,106.02 ; v1(105.08,84.912) 103.226,84.912 100.863,82.55 100.863,80.823 100.981,80.705 ; v1(107.112,106.02) 103.069,106.02 ; 93.35,53.848 93.68,53.518 96.368,53.518 96.368,54.788 99.06,57.48 99.06,59.614 98.476,60.198 Power.2@97.783,60.198 97.231,60.198 ; 93.447,106.858 93.701,107.112 ; 93.447,106.858 93.447,107.112 93.701,107.112 ; 93.701,107.112 101.956,107.112 103.048,106.02 103.069,106.02 ; 93.701,107.112 93.726,107.137 101.951,107.137 103.069,106.02
  Bottom Layer w0.254: v1(89.764,50.114) 92.05,52.4 v1(93.35,52.4) ; v1(91.374,101.361) 92.126,100.609 v1(96.749,100.609) ; v1(93.98,79.477) 94.691,79.477 100.889,73.279 100.889,69.088 102.159,67.818 102.159,61.874 101.727,61.443 v1(95.987,61.443) ; v1(103.886,90.195) 105.08,89.002 v1(105.08,84.912) ; v1(107.112,106.02) 107.696,106.02 109.982,103.734 111.252,103.734 111.633,104.115 111.633,108.814 113.182,110.363 120.929,110.363 122.58,108.712 123.368,108.712 124.384,107.696 124.384,102.362 124.13,102.108 P2.23@123.19,102.108
+3.3: ENR1.2 UC1.1 UC2.1 USB.6 USB.7 | length 69.7
  Top Layer w0.254: UC2.1@90.947,80.518 UC2.1@91.328,80.137 ; USB.7@94.112,75.348 91.736,77.724 UC1.1@90.678,77.724 90.678,79.488 UC2.1@91.328,80.137 ; v1(109.423,84.912) 108.407,85.928 103.48,85.928 98.817,81.266 92.456,81.266 UC2.1@91.328,80.137 ; ENR1.2@114.935,105.395 114.935,103.886 v1(115.443,103.378)
  Bottom Layer w0.254: v1(109.423,84.912) 110.414,83.922 110.414,80.721 112.899,78.236 114.71,78.236 115.773,79.299 115.773,83.795 114.554,85.014 114.554,89.408 115.824,90.221 116.546,90.943 116.546,94.789 113.69,97.645 113.69,101.625 v1(115.443,103.378)
+5: JD1.1 P2.24 Pc1.2 Power.3 PR1.2 | length 105.2
  Top Layer w0.254: Pc1.2@93.477,66.167 93.477,63.499 94.488,62.488 Power.3@97.783,62.488 97.783,61.62 100.101,59.302 100.101,58.517 PR1.2@100.457,58.517 100.457,57.912 ; JD1.1@96.901,51.435 96.901,54.356 100.457,57.912 ; v1(113.538,53.111) 112.954,53.696 104.648,53.696 103.632,54.712 103.632,55.245 103.124,55.753 101.6,55.753 100.457,56.896 100.457,57.912 ; v1(119.558,51.638) 119.558,63.779 117.958,65.38 117.958,84.15 119.913,86.106 119.913,92.405 120.802,93.294 120.802,99.466 118.872,101.397 118.364,101.397 117.712,102.049 117.712,102.954 118.186,103.429 122.936,103.429 P2.24@123.19,104.648
  Bottom Layer w0.254: v1(113.538,53.111) 114.529,52.121 119.075,52.121 v1(119.558,51.638)
GND: AC1.1 AR1.1 BC!.1 BC!.2 Boot.1 Boot.2 EC1.1 EN.1 ENC1.2 ESC1.1 ESC2.2 ESP32.25 IO.12 J1.A1 J1.A12 JD2.1 JD3.1 JD4.1 P1.2 P2.25 Pc1.1 PC2.1 PDS.2 Power.1 Q2.2 UC1.2 UC2.2 UR2.1 UR5.1 | length 252.8
  Top Layer w0.254: v1(87.376,49.784) 86.36,48.768 P1.2@83.312,48.768 84.787,47.293 Boot.2@90.805,47.293 Boot.1@90.805,43.893 ; ESC2.2@90.17,100.061 89.408,100.061 88.9,100.569 88.9,103.886 89.408,104.394 EC1.1@90.297,104.394 90.297,103.53 90.932,102.895 91.618,102.895 92.405,102.108 92.405,99.212 91.465,98.273 91.465,94.579 91.186,94.3 ESC1.1@90.297,94.3 90.297,94.251 90.068,94.251 90.068,91.846 ; PDS.2@90.297,90.768 90.068,90.768 90.068,91.846 ; v1(90.805,81.966) 90.627,81.966 89.647,80.986 UC2.2@89.647,80.518 89.647,80.035 89.821,79.862 UC1.2@89.821,77.724 89.821,76.492 89.256,75.926 89.256,74.168 90.028,73.396 BC!.1@90.028,71.247 BC!.2@91.328,71.247 ; v1(91.084,92.862) 90.068,91.846 ; v1(92.558,57.734) v1@92.735,58.217 ; PC2.1@95.25,54.737 95.25,56.007 96.52,57.277 97.358,57.277 ; v1(96.52,56.439) 97.358,57.277 ; v1(100.381,75.616) 99.873,75.108 99.873,67.488 98.552,66.167 Pc1.1@95.377,66.167 95.377,68.707 95.772,69.102 UR2.1@95.772,71.247 95.123,71.247 95.123,71.12 94.844,70.841 92.354,70.841 91.948,71.247 BC!.2@91.328,71.247 ; v1(101.905,69.85) 101.905,71.064 UR5.1@102.108,71.064 103.398,71.064 104.47,72.136 104.47,76.632 ; v1(102.616,54.737) 102.616,53.823 103.251,53.188 108.991,53.188 110.49,51.689 JD2.1@110.49,51.664 ; IO.12@108.058,77.543 108.058,77.826 105.664,77.826 104.47,76.632 ; JD2.1@110.49,51.647 JD2.1@110.49,51.664 ; ESP32.25@112.101,89.76 111.481,89.76 111.481,86.537 114.172,83.845 114.172,82.673 ; v1(112.751,84.094) 114.172,82.673 ; AC1.1@114.172,81.026 114.172,81.788 ; v1(114.757,107.518) 115.164,107.925 122.453,107.925 P2.25@123.19,107.188 119.939,103.937 117.78,103.937 115.824,101.981 ENC1.2@115.189,101.981 ; v1(115.164,91.237) 115.407,90.993 Q2.2@117.088,90.993 ; EN.1@116.84,44.02 113.419,44.02 111.177,46.261 110.685,46.261 110.617,46.33 JD4.1@110.617,46.397 110.617,47.371 110.49,47.498 JD3.1@110.49,48.514 110.49,48.87 110.744,48.87 111.049,49.174 111.049,51.359 110.744,51.664 JD2.1@110.49,51.664 ; BC!.2@91.328,71.247 91.328,63.871 90.297,62.84 90.297,58.598 90.678,58.217 v1@92.735,58.217 ; v1@92.735,58.217 93.396,58.877 95.424,58.877 96.393,57.908 Power.1@97.783,57.908 97.783,57.404 ; 97.358,57.277 97.783,57.277 97.783,57.404 ; 97.358,57.277 97.485,57.404 97.783,57.404 ; 104.47,76.632 104.47,79.705 105.664,80.899 AR1.1@108.219,80.899 108.219,81.788 108.54,82.109 113.851,82.109 114.172,81.788 ; 114.172,81.788 114.172,82.673
  Bottom Layer w0.254: v1(87.376,49.784) 87.376,55.702 89.408,57.734 v1(92.558,57.734) ; v1(90.805,81.966) 90.805,82.321 90.653,82.474 90.653,92.431 v1(91.084,92.862) ; v1(96.52,56.439) 100.914,56.439 v1(102.616,54.737) ; v1(100.381,75.616) 101.905,74.092 v1(101.905,69.85) ; v1(112.751,84.094) 114.021,85.364 114.021,90.094 v1(115.164,91.237) 114.706,91.237 113.132,92.812 113.132,95.987 112.649,96.469 112.649,105.41 v1(114.757,107.518)
NetAC1_2: AC1.2 IO.24
NetAR1_2: AR1.2 IO.15 | length 30.2
  Top Layer w0.254: IO.15@109.358,70.793 109.358,68.072 111.238,66.192 114.65,66.192 116.307,67.849 116.307,80.171 116.153,80.325 112.664,80.325 112.095,79.756 111.028,79.756 110.871,79.913 AR1.2@110.871,80.899